# Altium PCB PCB1.PcbDoc
Units mm, origin at the board's own origin, x right, y up, seen from the top; angles counter-clockwise.
Board outline 20.57 x 22.73 mm, 2 copper layers (Top Layer, Bottom Layer); 2 components, 15 nets, 32 pads, 0 vias.
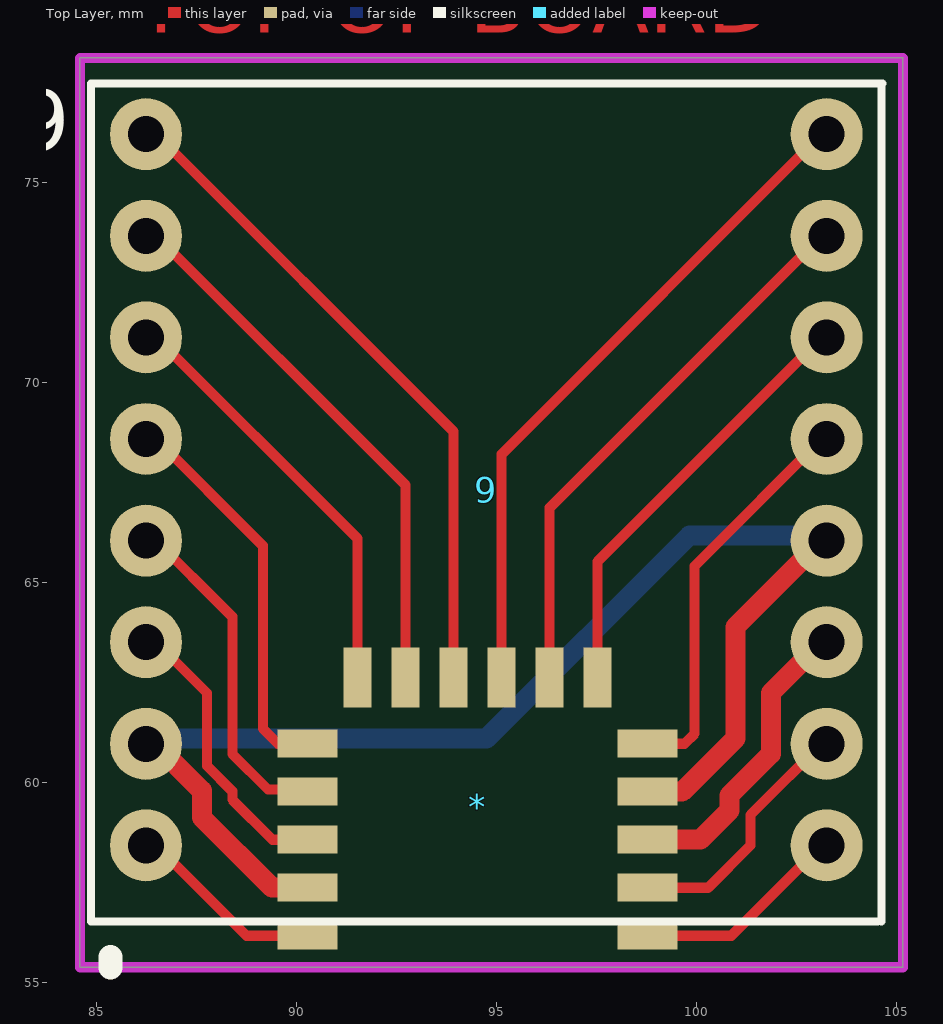
[diagram p0: Top Layer view]
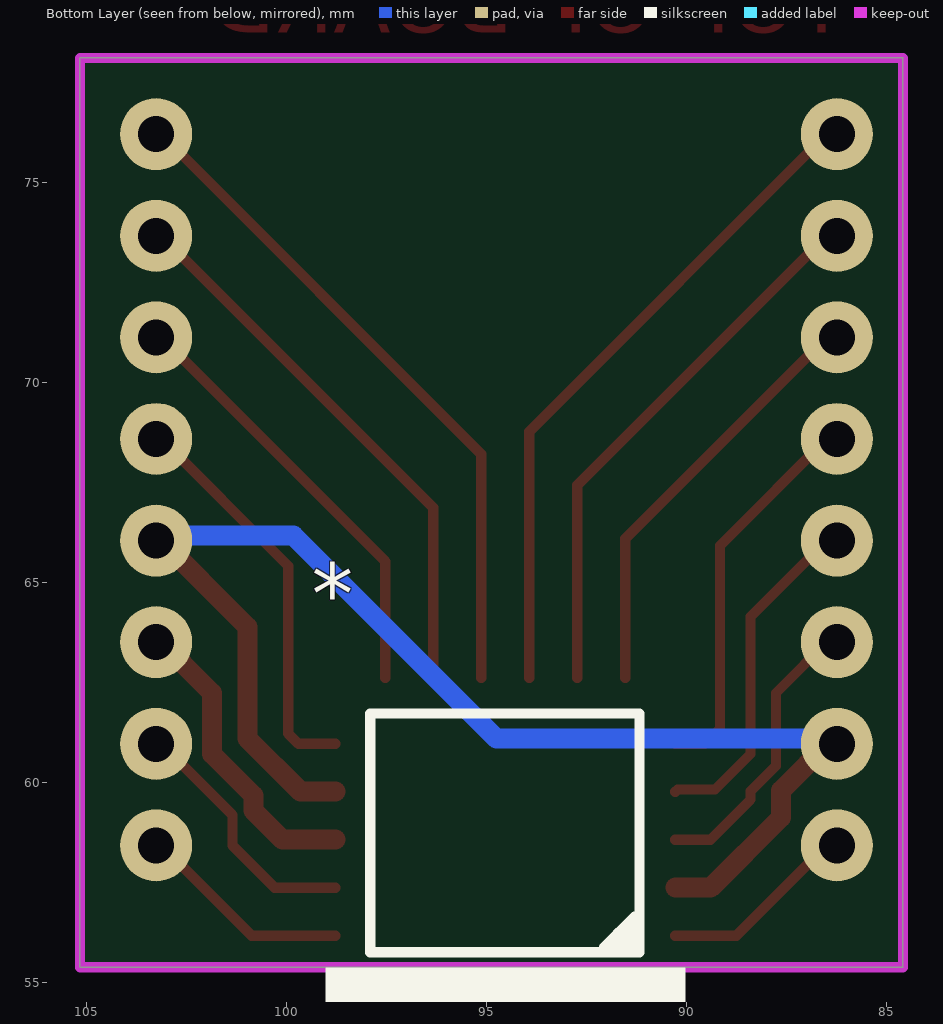
[diagram p1: Bottom Layer view, seen from below]

## Layer stack, top to bottom
Top Solder: solder mask 0.0102, Solder Resist, Dk 3.5
Top Layer: signal copper 0.0356
Dielectric 1: dielectric 0.32, FR-4, Dk 4.8
Bottom Layer: signal copper 0.0356
Bottom Solder: solder mask 0.0102, Solder Resist, Dk 3.5

## Board outline
84.582,55.372 105.156,55.372 105.156,78.105 84.582,78.105

## Design rules (kind name [scope] priority, off if disabled: settings)
BoardOutlineClearance [All] p1: gap=0.3 ignorepadtopadclearanceinfootprint=FALSE
Clearance [All] p1: gap=0.152 ignorepadtopadclearanceinfootprint=FALSE except(0: Arc-Hole Track-Hole SMDPad-Hole THPad-Hole Via-Hole Fill-Hole Poly-Hole Region-Hole Text-Hole)
ComponentClearance [All] p1: gap=0.1 collisioncheckmode=3 verticalgap=0.254 showdistances=FALSE
FabricationTestPointUsage TestPointUsage [All] p1: valid=0 allowmultiple=FALSE
FabricationTestpoint Testpoint [All] p1: side=3 testpointundercomponent=TRUE minsize=1.016 maxsize=2.54 preferedsize=1.524 minholesize=0 maxholesize=1.016 preferedholesize=0.813 testpointgrid=0.025 allowsidetop=TRUE allowsidebottom=TRUE usegrid=TRUE gridtolerance=0
HoleSize [All] p1: absolutevalues=TRUE maxlimit=6.3 minlimit=0.3 maxpercent=80.000 minpercent=20.000
HoleToHoleClearance [All] p1: gap=0.45 allowstackedmicrovias=TRUE
MinimumAnnularRing [All] p1: minimumring=0.15
MinimumSolderMaskSliver [All] p1: minsoldermaskwidth=0.075
PlaneClearance [All] p1: clearance=0.5
PlaneConnect [All] p1: planeconnectstyle=Direct reliefexpansion=0.508 reliefentries=4 reliefconductorwidth=0.254 reliefairgap=0.254
PolygonConnect "GND Via" [isVia AND InNet('GND')] p1: connectstyle=Direct reliefconductorwidth=0.254 reliefentries=4 polygonreliefangle="90 Angle" airgapwidth=0.254 // GND Via Connection
PolygonConnect [All] p2: connectstyle=Relief reliefconductorwidth=0.254 reliefentries=4 polygonreliefangle="90 Angle" airgapwidth=0.25
RoutingVias [All] p1: holewidth=0.3 width=0.6 viastyle="Through Hole" minholewidth=0.3 minwidth=0.6 maxholewidth=6.3 maxwidth=6.6
SilkToSilkClearance [All] p1: silktosilkclearance=0.15
SilkToSolderMaskClearance SilkscreenOverComponentPads [IsPad] p1: minsilkscreentomaskgap=0.25 clearancetoexposedcopper=TRUE
SolderMaskExpansion [All] p1: expansion=0.1
Width [All] p1: maxlimit=2 minlimit=0.152 preferedwidth=0.25 minimp=50.000000 maximp=50.000000 favimp=50.000000
20 further rules are at their usual default settings.

## Components (designator, comment, footprint, x,y, rotation, side; value= is the part's Value field where it differs from the comment)
9 "17pin_DOUBLE_0.1_header" 17pin_DOUBLE_0.1_header 103.251,58.42 r0 top
* "BM71 Bluetooth Module" BM71BLES1FC2 90.023,62.861 r0 bottom

## Footprints (in the part's own frame and the unit in brackets; to place one, negate y for a bottom-side part, rotate by r counter-clockwise, add the part's x,y. Pads: shape width x height; smd on the part's side, far side on the other; paste and mask are expansions set on the pad)
17pin_DOUBLE_0.1_header [mm]
  round 1.8 hole 0.9: 1(-17.018,0) 2(-17.018,2.54) 3(-17.018,5.08) 4(-17.018,7.62) 5(-17.018,10.16) 6(-17.018,12.7) 7(-17.018,15.24) 8(-17.018,17.78) 9(0,17.78) 10(0,15.24) 11(0,12.7) 12(0,10.16) 13(0,7.62) 14(0,5.08) 15(0,2.54) 16(0,0)
  silkscreen extent -18.39,-3.05 1.4,19.05, body extent -17.27,-0.44 0.25,18.22, height 4
BM71BLES1FC2 [mm] "Bluetooth Module"
  rect 1.5x0.7 smd far side: 1(0.25,6.7) 2(0.25,5.5) 3(0.25,4.3) 4(0.25,3.1) 5(0.25,1.9) 12(8.75,1.9) 13(8.75,3.1) 14(8.75,4.3) 15(8.75,5.5) 16(8.75,6.7)
  rect 0.7x1.5 smd far side: 6(1.5,0.25) 7(2.7,0.25) 8(3.9,0.25) 9(5.1,0.25) 10(6.3,0.25) 11(7.5,0.25)
  silkscreen extent 0,1.14 9,11.5

## Nets (pads, with @x,y where several pads share a name; then routed paths per layer and width w, separated by ;. In a path a pad name is that pad's centre, name@x,y a point inside that pad or via, vN(x,y) a via of type N, cw(c..) or ccw(c..) an arc to the next point about the centre after c; other vN are vias at no path point)
GND: 9.2 9.13 *.2 *.13 | length 33.6
  Top Layer w0.5: 9.2@86.36,61.087 86.36,61.057 87.63,59.787 87.63,59.119 89.388,57.361 *.2 ; *.13 99.639,59.761 100.965,61.087 100.965,63.881 9.13@103.251,66.167
  Bottom Layer w0.5: 9.2@86.36,61.087 94.742,61.087 99.822,66.167 9.13@103.251,66.167
Net*_1: 9.1 *.1 | length 4.9
  Top Layer w0.254: 9.1@86.36,58.547 88.746,56.161 *.1
Net*_3: 9.3 *.3 | length 7.2
  Top Layer w0.254: 9.3@86.36,63.627 87.757,62.23 87.757,60.408 88.392,59.773 88.392,59.563 89.394,58.561 *.3
Net*_4: 9.4 *.4 | length 8.6
  Top Layer w0.254: 9.4@86.36,66.167 88.392,64.135 88.392,60.706 89.281,59.817 90.217,59.817 *.4
Net*_5: 9.5 *.5 | length 9.8
  Top Layer w0.254: 9.5@86.36,68.707 89.154,65.913 89.154,61.341 89.534,60.961 *.5
Net*_6: 9.6 *.6 | length 10.8
  Top Layer w0.254: 9.6@86.36,71.247 91.523,66.084 *.6
Net*_7: 9.7 *.7 | length 13.8
  Top Layer w0.254: 9.7@86.36,73.787 92.723,67.424 *.7
Net*_8: 9.8 *.8 | length 16.8
  Top Layer w0.254: 9.8@86.36,76.327 93.923,68.764 *.8
Net*_9: 9.9 *.9 | length 17.1
  Top Layer w0.254: *.9 95.123,68.199 9.9@103.251,76.327
Net*_10: 9.10 *.10 | length 14
  Top Layer w0.254: *.10 96.323,66.859 9.10@103.251,73.787
Net*_11: 9.11 *.11 | length 11
  Top Layer w0.254: *.11 97.523,65.519 9.11@103.251,71.247
Net*_12: 9.12 *.12 | length 10.1
  Top Layer w0.254: *.12 99.696,60.961 99.949,61.214 99.949,65.405 9.12@103.251,68.707
Net*_15: 9.15 *.15 | length 6.5
  Top Layer w0.254: *.15 100.287,57.361 101.346,58.42 101.346,59.182 9.15@103.251,61.087
Net*_16: 9.16 *.16 | length 5.5
  Top Layer w0.254: *.16 100.865,56.161 9.16@103.251,58.547
VBAT: 9.14 *.14 | length 7.7
  Top Layer w0.5: *.14 100.09,58.561 100.817,59.288 100.817,59.669 101.854,60.706 101.854,62.23 9.14@103.251,63.627

## Keep-outs
Keep-Out Layer:
  the board outline again, w0.254

## Other copper
Top Layer:
  text "TOP OF BOARD" at 85.979,78.74 h1.52